# Altium PCB PCB1.PcbDoc
Units mm, origin at the board's own origin, x right, y up, seen from the top; angles counter-clockwise.
Board outline 122.55 x 75.82 mm, 2 copper layers (Top Layer, Bottom Layer); 8 components, 9 nets, 51 pads, 0 vias.
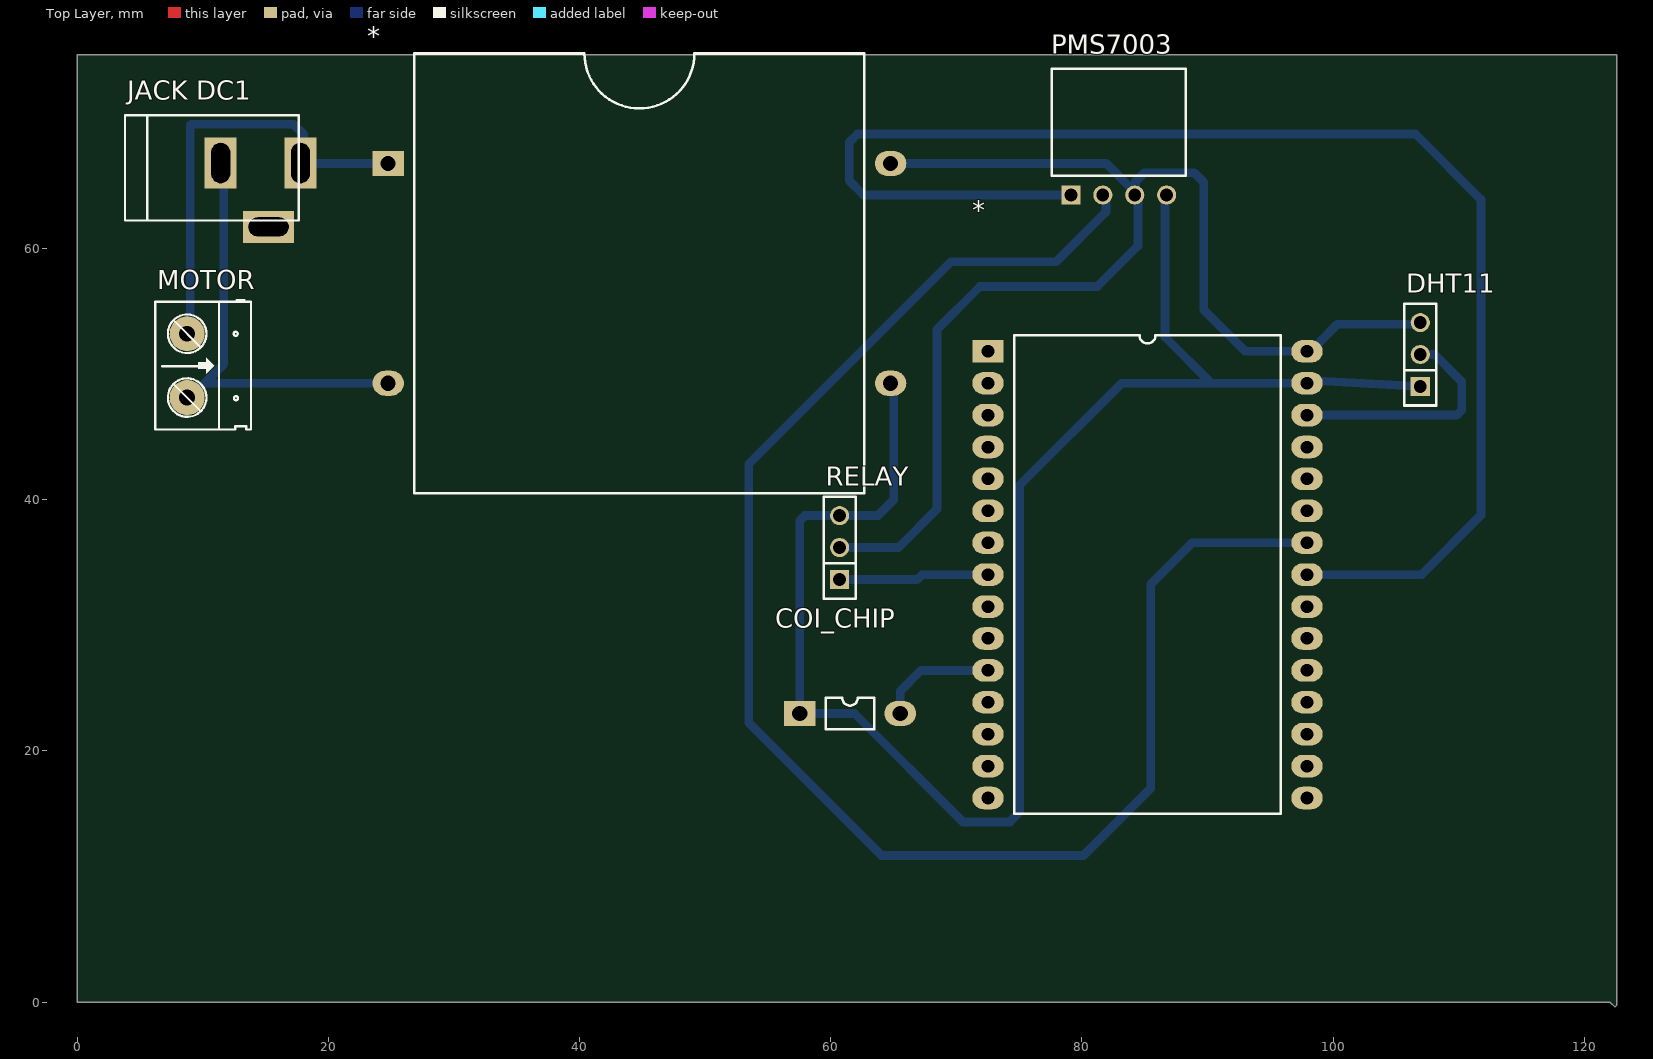
[diagram p0: Top Layer view]
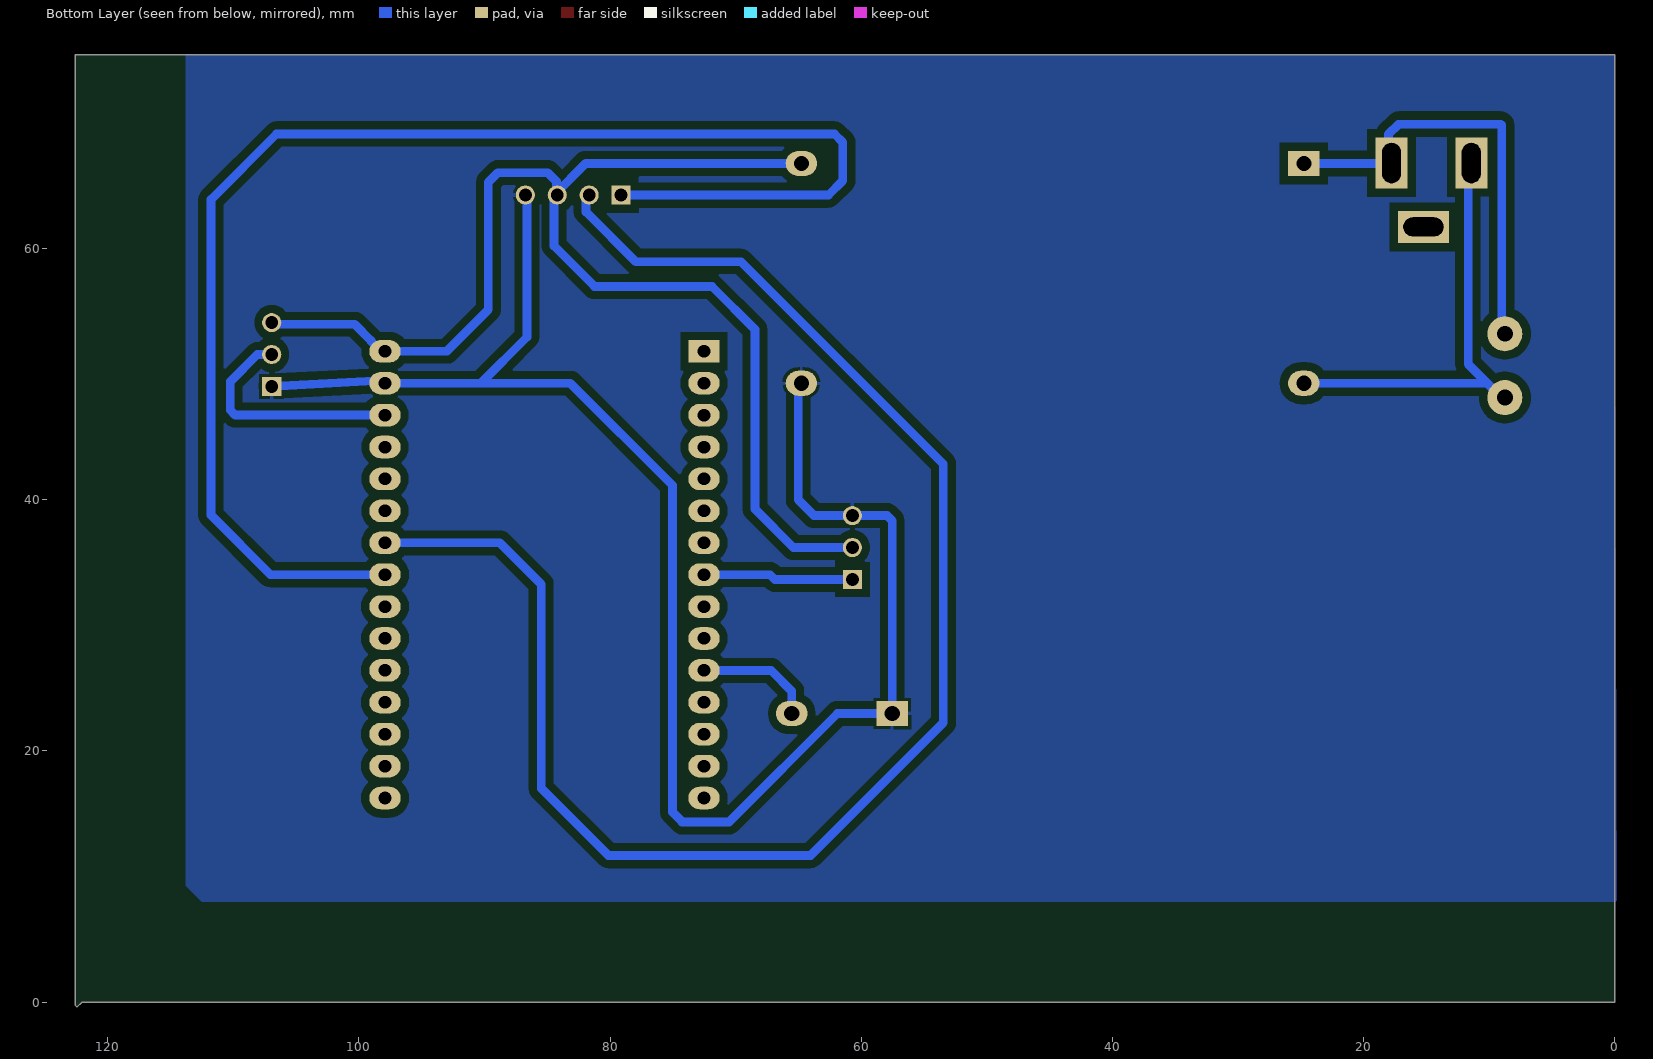
[diagram p1: Bottom Layer view, seen from below]
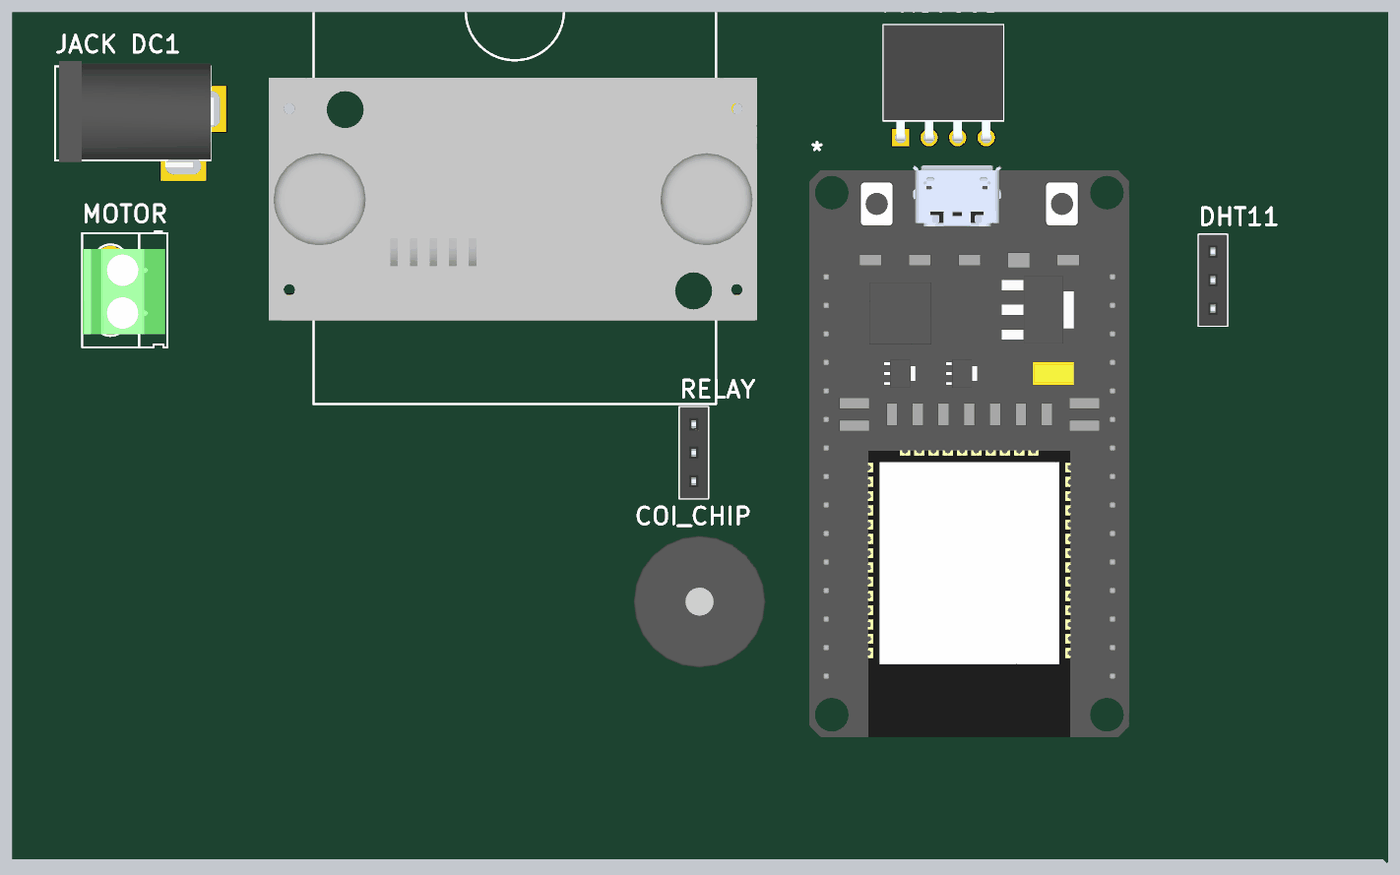
[diagram p2: 3D render of the assembled board from above, using the file's embedded part models]

## Layer stack, top to bottom
Top Solder: solder mask 0.0102, Solder Resist, Dk 3.5
Top Layer: signal copper 0.0356
Dielectric 1: dielectric 0.32, FR-4, Dk 4.8
Bottom Layer: signal copper 0.0356
Bottom Solder: solder mask 0.0102, Solder Resist, Dk 3.5

## Board outline
0,75.438 122.555,75.438 122.555,-0.254 122.428,-0.381 122.047,0 0,0

## Design rules (kind name [scope] priority, off if disabled: settings)
Clearance [All] p1: gap=0.65 ignorepadtopadclearanceinfootprint=FALSE
DiffPairsRouting [All] p1: maxlimit=0.7 minlimit=0.4 mostfreqgap=0.5 toplayer_minwidth=0.6 toplayer_maxwidth=0.7 toplayer_prefwidth=0.65 bottomlayer_minwidth=0.6 bottomlayer_maxwidth=0.7 bottomlayer_prefwidth=0.65 maxuncoupledlength=12.7
PolygonConnect [All] p1: connectstyle=Relief reliefconductorwidth=0.254 reliefentries=4 polygonreliefangle="90 Angle" airgapwidth=0.254
RoutingLayers [All] p1: top layer_v5=FALSE bottom layer_v5=TRUE
RoutingVias [All] p1: holewidth=0.711 width=1.27 viastyle="Through Hole" minholewidth=0.711 minwidth=1.27 maxholewidth=0.711 maxwidth=1.27
SolderMaskExpansion [All] p1: expansion=0.102 istentingtop=FALSE
Width [All] p1: maxlimit=0.8 minlimit=0.6 preferedwidth=0.7
28 further rules are at their usual default settings.

## Classes and differential pairs
component class BAO_CHAY_SCHEMATIC: * DHT11 "JACK DC1" MOTOR PMS7003 RELAY

## Components (designator, comment, footprint, x,y, rotation, side; value= is the part's Value field where it differs from the comment)
* "BUCK_LM2596" DIP4 24.765,66.776 r0 top
* "ESP32" ESP32 72.517,51.816 r0 top
COI_CHIP "COI_CHIP" "COI_CHIP - duplicate" 57.532,22.987 r0 top
DHT11 "DHT11" "JP 1x3 CT" 106.934,49.022 r90 top
"JACK DC1" "JACK DC 5.5" "JACK DC 5.5" 14.605,64.262 r0 top value="Jac DC"
MOTOR "MOTOR" "Con 2 KF301 5.08" 8.763,53.213 r270 top
PMS7003 "PMS7003" "JP 1x4 CC" 82.931,64.262 r0 top
RELAY "RELAY" "JP 1x3 CT" 60.706,33.655 r90 top

## Footprints (in the part's own frame and the unit in brackets; to place one, negate y for a bottom-side part, rotate by r counter-clockwise, add the part's x,y. Pads: shape width x height; smd on the part's side, far side on the other; paste and mask are expansions set on the pad)
"COI_CHIP - duplicate" [mm]
  rect 2.5x2 hole 1.2: 1(0,0)
  oval 2.5x2 hole 1.2: 2(8,0)
  silkscreen extent 2.08,-1.25 5.92,1.25, body extent -2.19,-5.93 9.56,5.82, height 10.7
"Con 2 KF301 5.08" [mil]
  round 110 hole 50: 1(0,0) 2(200,0)
  silkscreen extent -106,-100 300,200, body extent -45,-97 255,190, height 335
DIP4 [mm]
  rect 2.5x2 hole 1.2: 1(0,0)
  oval 2.5x2 hole 1.2: 2(0,-17.5) 3(40,-17.5) 4(40,0)
  silkscreen extent 2.08,-26.25 37.91,8.75, body extent -1.91,-18.8 41.59,2.8, height 11.5
ESP32 [mm]
  rect 2.5x1.8 hole 1: 1(0,0)
  oval 2.5x1.8 hole 1: 2(0,-2.54) 3(0,-5.08) 4(0,-7.62) 5(0,-10.16) 6(0,-12.7) 7(0,-15.24) 8(0,-17.78) 9(0,-20.32) 10(0,-22.86) 11(0,-25.4) 12(0,-27.94) 13(0,-30.48) 14(0,-33.02) 15(0,-35.56) 16(25.4,-35.56) 17(25.4,-33.02) 18(25.4,-30.48) 19(25.4,-27.94) 20(25.4,-25.4) 21(25.4,-22.86) 22(25.4,-20.32) 23(25.4,-17.78) 24(25.4,-15.24) 25(25.4,-12.7) 26(25.4,-10.16) 27(25.4,-7.62) 28(25.4,-5.08) 29(25.4,-2.54) 30(25.4,0)
  silkscreen extent 2.08,-36.83 23.32,1.27, body extent -1.52,-40.96 26.98,9.97, height 10.2
"JACK DC 5.5" [mm] "Jac DC input"
  rect 2.54x4.064 hole 1.5 slot 3.2 at 90 deg: 1(3.175,2.54) 2(-3.175,2.54)
  rect 4.064x2.54 hole 1.5 slot 3.2 at 0 deg: 3(0.635,-2.54)
  silkscreen extent -10.79,-2.03 3.05,6.35, body extent -10.42,-2.67 3.4,6.84, height 11.02
"JP 1x3 CT" [mm]
  rect 1.52x1.52 hole 1.02: 1(0,0)
  round 1.52 hole 1.02: 2(2.54,0) 3(5.08,0)
  silkscreen extent -1.52,-1.27 6.6,1.27, body extent -1.52,-1.25 6.6,1.25, height 8.51
"JP 1x4 CC" [mm]
  rect 1.52x1.52 hole 1.02: 1(-3.81,0)
  round 1.52 hole 1.02: 2(-1.27,0) 3(1.27,0) 4(3.81,0)
  silkscreen extent -5.33,1.52 5.33,10.03, body extent -5.33,-0.25 5.33,10.05, height 2.51

## Part data
DHT11 RELAY: library part "JP 1x3 2.54 Cai Thang", "Cắm", Chung_Loai=Cắm, Don_Vi=Con, Ma_Hang=MH004006, Ten_Linh_Kien="Jump Đơn Cái 2.54MM 1x20P Thẳng"
MOTOR: library part "CON 2 KF301", "Cắm", Chung_Loai=Cắm, Don_Vi=Con, Ma_Hang=MH000987, Ten_Linh_Kien="CON 2 KF301-2P 5.08MM Xanh Dương"
PMS7003: library part "JP 1x4 2.54 Cai Cong", "Cắm", Chung_Loai=Cắm, Don_Vi=Con, Ma_Hang=MH001265, Ten_Linh_Kien="Jump Đơn Cái 2.54MM 1x40P Cong"

## Nets (pads, with @x,y where several pads share a name; then routed paths per layer and width w, separated by ;. In a path a pad name is that pad's centre, name@x,y a point inside that pad or via, vN(x,y) a via of type N, cw(c..) or ccw(c..) an arc to the next point about the centre after c; other vN are vias at no path point)
Net*_1: "JACK DC1.1" *.1@24.765,66.776 MOTOR.1 | length 35.3
  Bottom Layer w0.7: MOTOR.1@9.017,53.213 9.017,69.825 9.093,69.901 17.221,69.901 18.034,69.088 18.034,66.802 18.034,66.776 *.1@25.019,66.776
Net*_2: "JACK DC1.2" *.2@24.765,49.276 MOTOR.2 | length 34.6
  Bottom Layer w0.7: MOTOR.2@9.017,48.133 10.16,49.276 ; 11.684,66.802 11.684,50.8 10.16,49.276 ; *.2@25.019,49.276 10.16,49.276
Net*_3: *.3@64.765,49.276 *.29 COI_CHIP.1 DHT11.1 PMS7003.4 RELAY.3 | length 132.2
  Bottom Layer w0.7: *.3@65.019,49.276 65.019,40 63.754,38.735 60.96,38.735 57.942,38.735 57.532,38.325 COI_CHIP.1 61.89,22.987 70.521,14.356 74.264,14.356 75.021,15.113 75.021,41.137 83.16,49.276 90.297,49.276 ; PMS7003.4 86.614,64.135 86.614,52.959 90.297,49.276 ; DHT11.1@107.01,49.022 98.669,49.466 98.382,49.466 98.182,49.286 98.171,49.276 90.297,49.276
Net*_4: *.4@64.765,66.776 *.30 DHT11.3 PMS7003.3 RELAY.2 | length 103.5
  Bottom Layer w0.7: RELAY.2@60.96,36.195 65.405,36.195 68.453,39.243 68.453,53.543 71.882,56.972 81.229,56.972 84.455,60.198 84.455,64.262 81.941,66.776 *.4@65.019,66.776 ; PMS7003.3 84.273,64.334 84.273,65.35 84.963,66.04 88.925,66.04 89.687,65.278 89.687,55.118 92.989,51.816 98.223,51.816 99.025,52.618 99.025,52.67 100.33,53.975 107.061,53.975 DHT11.3@107.188,54.102
Net*_8: *.8 RELAY.1 | length 12
  Bottom Layer w0.7: RELAY.1@60.96,33.655 66.878,33.655 67.259,34.036 *.8@72.771,34.036
Net*_11: *.11 COI_CHIP.2 | length 9.7
  Bottom Layer w0.7: COI_CHIP.2 65.532,24.765 67.183,26.416 *.11@72.771,26.416
Net*_23: *.23 PMS7003.1 | length 114.8
  Bottom Layer w0.7: PMS7003.1@79.375,64.262 62.611,64.262 61.468,65.405 61.468,68.453 62.128,69.113 106.553,69.113 111.76,63.906 111.76,38.76 107.036,34.036 *.23@98.171,34.036
Net*_24: *.24 PMS7003.2 | length 127.6
  Bottom Layer w0.7: PMS7003.2@81.915,64.262 81.915,62.916 77.953,58.953 69.571,58.953 53.467,42.85 53.467,22.25 64.033,11.684 80.137,11.684 85.471,17.018 85.471,33.274 88.773,36.576 *.24@98.171,36.576
Net*_28: *.28 DHT11.2 | length 18.4
  Bottom Layer w0.7: *.28@98.171,46.736 109.826,46.736 110.236,47.146 110.236,49.403 108.077,51.562 DHT11.2@107.188,51.562
pads on no net: "JACK DC1.3" *.1@72.517,51.816 *.2@72.517,49.276 *.3@72.517,46.736 *.4@72.517,44.196 *.5 *.6 *.7 *.9 *.10 *.12 *.13 *.14 *.15 *.16 *.17 *.18 *.19 *.20 *.21 *.22 *.25 *.26 *.27

## Polygon pours and split planes (outlines as drawn)
Net*_3 on Bottom Layer "NET*_3_L02_P001" (solid, pour order 1): 0.098,75.41 0.126,75.438 113.792,75.438 113.792,9.271 112.522,8.001 -0.127,8.001